# EAGLE board NJM2670 (EAGLE 6.5.0)
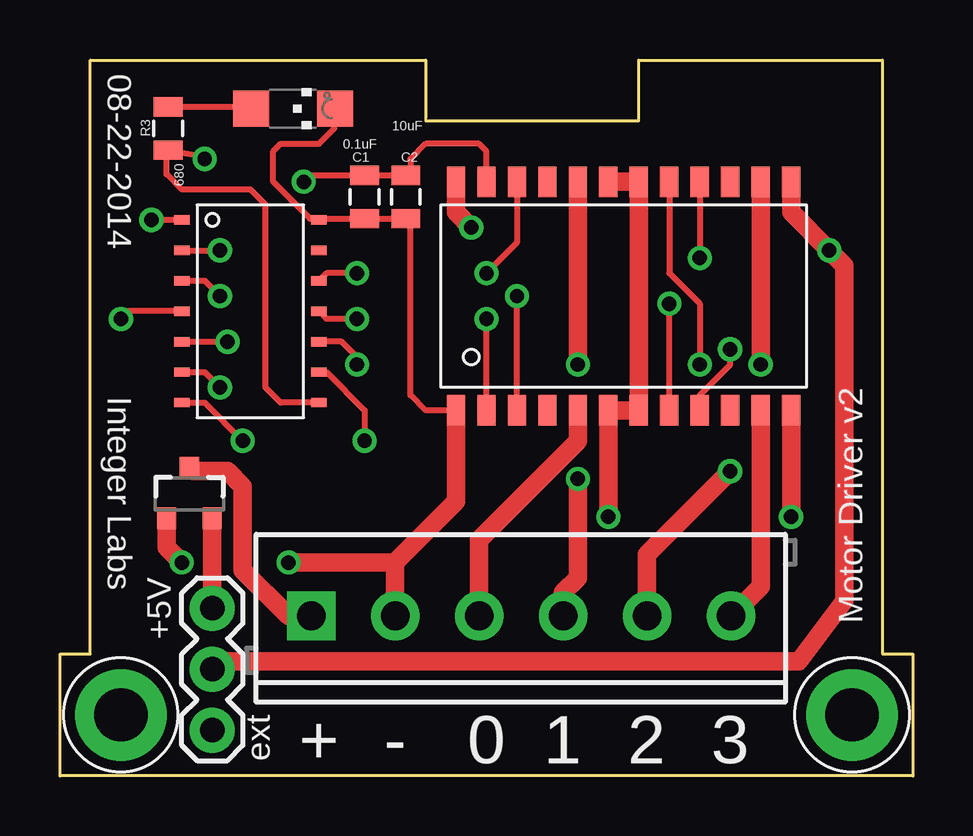
[diagram p0: board, top side]
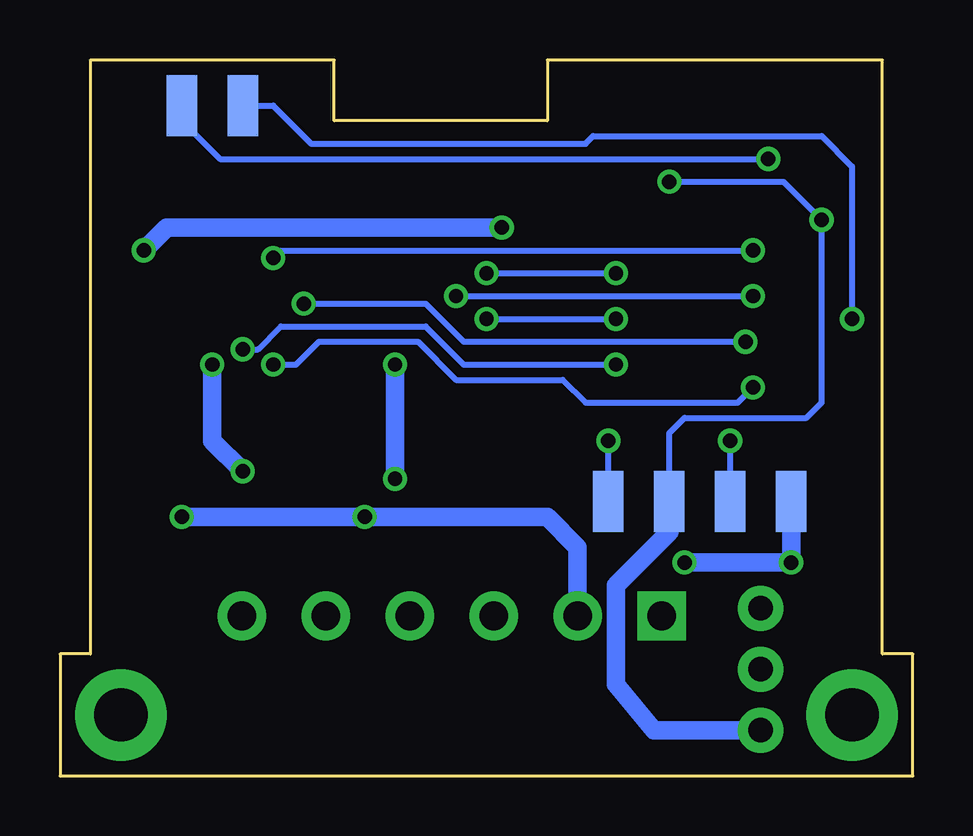
[diagram p1: board, bottom side, seen from below]

Size 35.56 x 29.84 mm. Coordinates in mm from the lower left corner, seen from the top.
Copper layers (1*16): Top 0.0178mm / dielectric 59mil / Bottom 0.0178mm
Design rules "SSC-EAGLE-2Lyr_v1.0.0.3": minimum track width 6mil, minimum drill 14mil, track to track 6mil, track to pad 6mil, pad to pad 6mil, via to via 6mil, smd to smd 6mil, copper to edge 20mil, drill to drill 16mil, minimum pad ring 8mil, minimum via ring 8mil, stop-mask expansion 3mil, vias tented up to drill 0mil, thermal gap 10mil

## Footprints (pad centres in the part's own frame; a part is rotated, then mirrored left to right if it is on the bottom)
0805 = smd 0.8 x 1.2: 1 -0.9,0; 2 0.9,0
1X03 = drill 1.016 pad 1.88: 1 0,0; 2 2.54,0; 3 5.08,0
SCREWTERMINAL-3.5MM-6 = drill 1.2 pad 2.032 square: 1 0,0 | drill 1.2 pad 2.032: 2 3.5,0; 3 7,0; 4 10.5,0; 5 14,0; 6 17.5,0
CHIPLED_1206 = smd 1.5 x 1.5: A 0,-1.75; C 0,1.75
SOT23-3 = smd 0.8 x 0.9: 1 -0.95,-1; 2 0.95,-1; 3 0,1.1
SOIC14 = smd 0.381 x 0.635: 1 0,-3.175; 2 1.27,-3.175; 3 2.54,-3.175; 4 3.81,-3.175; 5 5.08,-3.175; 6 6.35,-3.175; 7 7.62,-3.175; 8 7.62,2.54; 9 6.35,2.54; 10 5.08,2.54; 11 3.81,2.54; 12 2.54,2.54; 13 1.27,2.54; 14 0,2.54
FOOTPRINT2 = smd 1.27 x 2.54 bottom: GND 5.08,11.43; MISO 30.48,27.94; RESET 27.94,27.94; SCL 12.7,11.43; SDA 7.62,11.43; VCC 10.16,11.43 | drill 2.223 pad 3.81: P$1 2.54,2.54; P$2 33.02,2.54
SOP-24-E3 = smd 0.762 x 1.27: 1 -6.35,-4.445; 2 -5.08,-4.445; 3 -3.81,-4.445; 4 -2.54,-4.445; 5 -1.27,-4.445; 6 0,-4.445; 7 1.27,-4.445; 8 2.54,-4.445; 9 3.81,-4.445; 10 5.08,-4.445; 11 6.35,-4.445; 12 7.62,-4.445; 13 7.62,5.08; 14 6.35,5.08; 15 5.08,5.08; 16 3.81,5.08; 17 2.54,5.08; 18 1.27,5.08; 19 0,5.08; 20 -1.27,5.08; 21 -2.54,5.08; 22 -3.81,5.08; 23 -5.08,5.08; 24 -6.35,5.08

## Placement (x,y rotation side)
C1  0.1uF  [0805]  12.7,24.13 90 top
C2  10uF  [0805]  14.41,24.13 90 top
JP3  [1X03]  6.35,1.91 90 top
JP4  [SCREWTERMINAL-3.5MM-6]  10.48,6.67 0 top
LED  blue  [CHIPLED_1206]  9.72,27.81 270 top
Q1  MOSFET-PCHANNELIRLML2244  [SOT23-3]  5.4,11.75 0 top
R3  680  [0805]  4.51,26.99 270 top
U$3  TINY841  [SOIC14]  8.26,23.18 270 top
U$4  FOOTPRINTFOOTPRINT-2  [FOOTPRINT2]  0,0 0 top
U$6  NJM2670  [SOP-24-E3]  22.86,19.68 0 top

## Library data of the parts
C1 C2 = SparkFun-Capacitors
JP3 JP4 = SparkFun-Connectors
LED = led
Q1 = SparkFun-DiscreteSemi; PROD_ID: TRANS-11153
R3 = SparkFun-Passives
U$3 U$4 U$6 = IntegerLabs

## Nets
ENABLEA: U$3.3 U$6.3
ENABLEB: U$3.10 U$6.9
GND: C1.1 C2.1 JP4.2 LED.C Q1.1 U$3.14 U$4.GND U$6.1 U$6.6 U$6.7 U$6.12 U$6.18 U$6.19
INA1: U$3.11 U$6.2
INA2: U$3.12 U$6.22
INB1: U$3.5 U$6.8
INB2: U$3.6 U$6.17
MISO/LED: R3.2 U$3.8 U$4.MISO
N$1: JP3.3 Q1.2
N$5: LED.A R3.1
N$11: JP4.3 U$6.5
N$12: JP4.4 U$6.20
N$13: JP4.5 U$6.14
N$14: JP4.6 U$6.11
RESET: U$3.4 U$4.RESET
SCL/SCK: U$3.9 U$4.SCL
SDA/MOSI: U$3.7 U$4.SDA
TSD: U$3.2 U$6.16
VCC: C1.2 C2.2 JP3.1 U$3.1 U$4.VCC U$6.23
VIN: JP4.1 Q1.3
VS: JP3.2 U$6.13 U$6.24

## Tracks (layer width: path | path; a pad name or v marks a point on that pad's centre or on a via)
ENABLEA  (via drill 0.6)
  Top 0.254: U$6.3 v19.05,20 | U$3.3 6.03,20.64 v6.67,20
  Bottom 0.254: v19.05,20 v6.67,20
ENABLEB  (via drill 0.6)
  Top 0.254: U$6.9 26.67,15.88 27.94,17.14 v27.94,17.78 | v12.38,17.14 12.38,17.46 11.75,18.1 U$3.10
  Bottom 0.254: v27.94,17.78 27.3,17.78 26.35,18.73 20.32,18.73 18.73,17.14 v12.38,17.14
GND  (via drill 0.6)
  Top 0.254: U$3.14 10.79,23.23 | 10.79,23.23 C1.1 C2.1 14.61,23.04 14.61,15.88 15.24,15.24 U$6.1 | 10.79,23.23 10.43,23.23 8.89,24.77 8.89,26.04 9.21,26.35 10.79,26.35 11.43,26.99 11.43,27.78 LED.C
  Top 0.762: U$6.19 U$6.18 U$6.7 U$6.6 v22.86,10.79 | v9.53,8.89 13.97,8.89 | 13.97,8.89 16.51,11.43 U$6.1 | JP4.2 13.98,8.88 13.97,8.89 | Q1.1 4.45,9.52 v5.08,8.89 | U$6.12 v30.48,10.79
  Bottom 0.762: U$4.GND v5.08,8.89 v9.53,8.89 | v30.48,10.79 v22.86,10.79 15.24,10.79 13.98,9.53 JP4.2
INA1  (via drill 0.6)
  Top 0.254: U$6.2 v17.78,19.05 | v12.38,19.05 11.11,19.05 U$3.11
  Bottom 0.254: v17.78,19.05 v12.38,19.05
INA2  (via drill 0.6)
  Top 0.254: U$6.22 19.05,22.23 v17.78,20.95 | v12.38,20.95 11.11,20.95 U$3.12
  Bottom 0.254: v17.78,20.95 v12.38,20.95
INB1  (via drill 0.6)
  Top 0.254: U$6.8 v25.4,19.68 | U$3.5 v6.99,18.1
  Bottom 0.254: v25.4,19.68 20.32,19.68 18.73,18.1 v6.99,18.1
INB2  (via drill 0.6)
  Top 0.254: U$6.17 25.4,20.95 26.67,19.68 v26.67,17.14 | U$3.6 6.03,16.83 v6.67,16.19
  Bottom 0.254: v26.67,17.14 25.72,17.14 24.77,18.1 20.64,18.1 19.05,16.51 14.61,16.51 13.65,15.56 7.3,15.56 v6.67,16.19
MISO/LED  (via drill 0.6)
  Top 0.254: U$3.8 9.21,15.56 8.57,16.19 8.57,23.81 7.94,24.45 5.08,24.45 4.45,25.08 4.45,26.02 R3.2 6.3,25.77 v6.03,25.72
  Bottom 0.254: U$4.MISO 30.48,27.3 28.89,25.72 v6.03,25.72
N$1
  Top 0.762: JP3.3 Q1.2
N$5
  Top 0.254: R3.1 7.89,27.89 LED.A
N$11
  Top 0.762: U$6.5 21.59,13.97 17.46,9.84 17.46,6.68 JP4.3
N$12  (via drill 0.6)
  Top 0.762: U$6.20 v21.59,17.14 | JP4.4 20.98,7.64 21.59,8.26 v21.59,12.38
  Bottom 0.762: v21.59,17.14 v21.59,12.38
N$13  (via drill 0.6)
  Top 0.762: U$6.14 v29.21,17.14 | v27.94,12.7 24.48,9.24 JP4.5
  Bottom 0.762: v29.21,17.14 29.21,13.97 v27.94,12.7
N$14
  Top 0.762: U$6.11 29.21,7.9 JP4.6
RESET  (via drill 0.6)
  Top 0.254: U$3.4 2.86,19.37 v2.54,19.05
  Bottom 0.254: U$4.RESET 26.67,27.94 25.08,26.35 13.65,26.35 13.34,26.67 3.81,26.67 2.54,25.4 v2.54,19.05
SCL/SCK  (via drill 0.6)
  Top 0.254: U$3.9 11.11,16.83 12.7,15.24 v12.7,13.97
  Bottom 0.254: U$4.SCL v12.7,13.97
SDA/MOSI  (via drill 0.6)
  Top 0.254: U$3.7 6.03,15.56 v7.62,13.97
  Bottom 0.254: U$4.SDA v7.62,13.97
TSD  (via drill 0.6)
  Top 0.254: U$6.16 v26.67,21.59 | U$3.2 v6.67,21.91
  Bottom 0.254: v26.67,21.59 26.67,21.91 v6.67,21.91
VCC  (via drill 0.6)
  Top 0.254: U$3.1 v3.81,23.18 | v10.16,24.77 10.43,25.03 C1.2 C2.2 14.61,25.22 14.61,25.72 15.24,26.35 17.46,26.35 17.78,26.04 U$6.23
  Bottom 0.254: U$4.VCC 10.16,14.29 9.53,14.92 4.45,14.92 3.81,15.56 v3.81,23.18 5.4,24.77 v10.16,24.77
  Bottom 0.762: U$4.VCC 10.16,10.16 12.38,7.94 12.38,3.81 10.79,1.91 JP3.1
VIN
  Top 0.762: JP4.1 9.53,6.67 7.62,8.57 7.62,12.06 6.99,12.7 5.54,12.7 Q1.3
VS  (via drill 0.6)
  Top 0.762: U$6.13 30.48,23.5 v32.07,21.91 32.7,21.27 32.7,7.3 30.8,4.76 6.99,4.76 JP3.2 | U$6.24 16.51,23.5 v17.14,22.86
  Bottom 0.762: v17.14,22.86 31.11,22.86 v32.07,21.91

## Text on the board
tPlace: 08-22-2014 | Integer Labs | +5V | Motor Driver v2 | ext
tNames: + | - | 0 | 1 | 2 | 3